# Altium PCB GT502W_BGS2.PcbDoc (part 1 of 2)
Units mil, origin at the board's own origin, x right, y up, seen from the top; angles counter-clockwise.
Board outline 2072.48 x 2691 mil, 2 copper layers (Top Layer, Bottom Layer), stack 10.556 mil thick; 126 components, 99 nets, 511 pads, 440 vias.
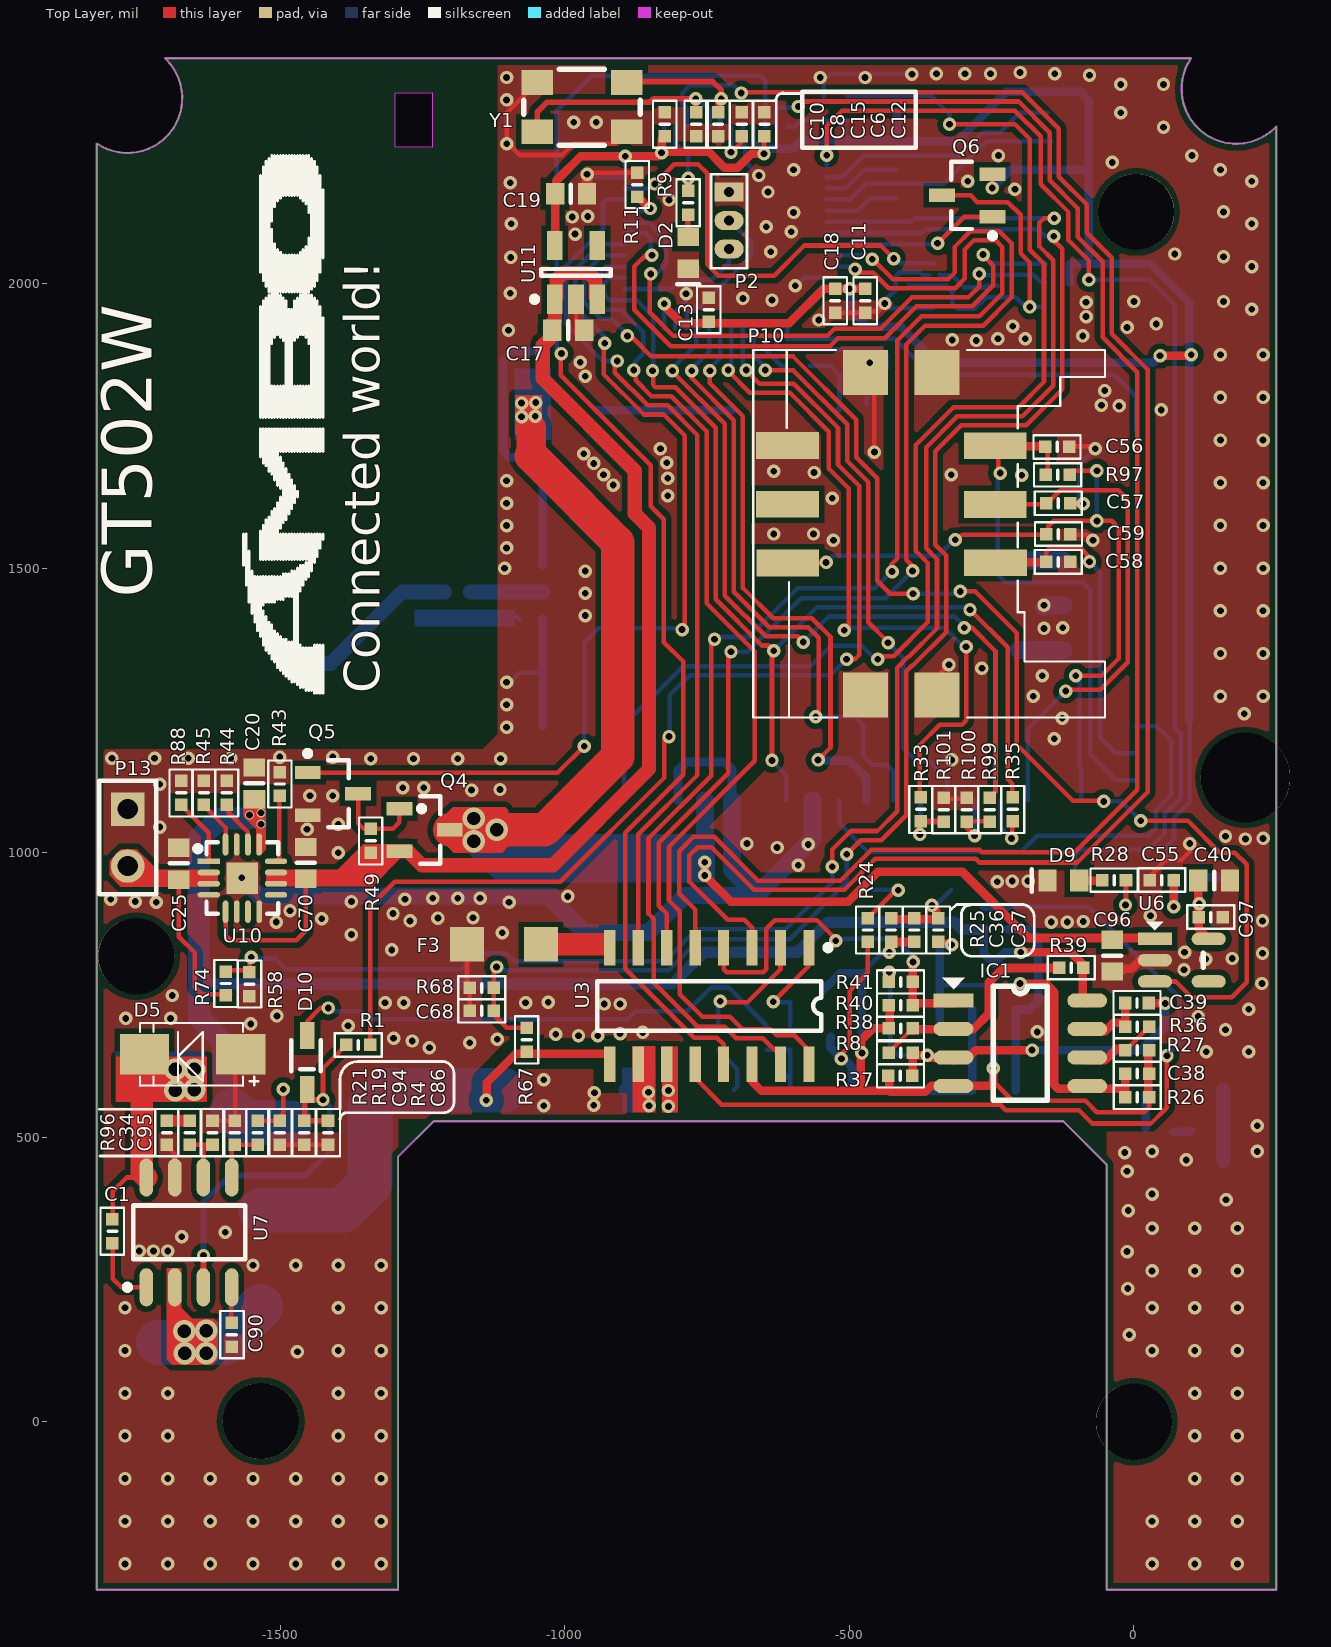
[diagram p0: Top Layer view]
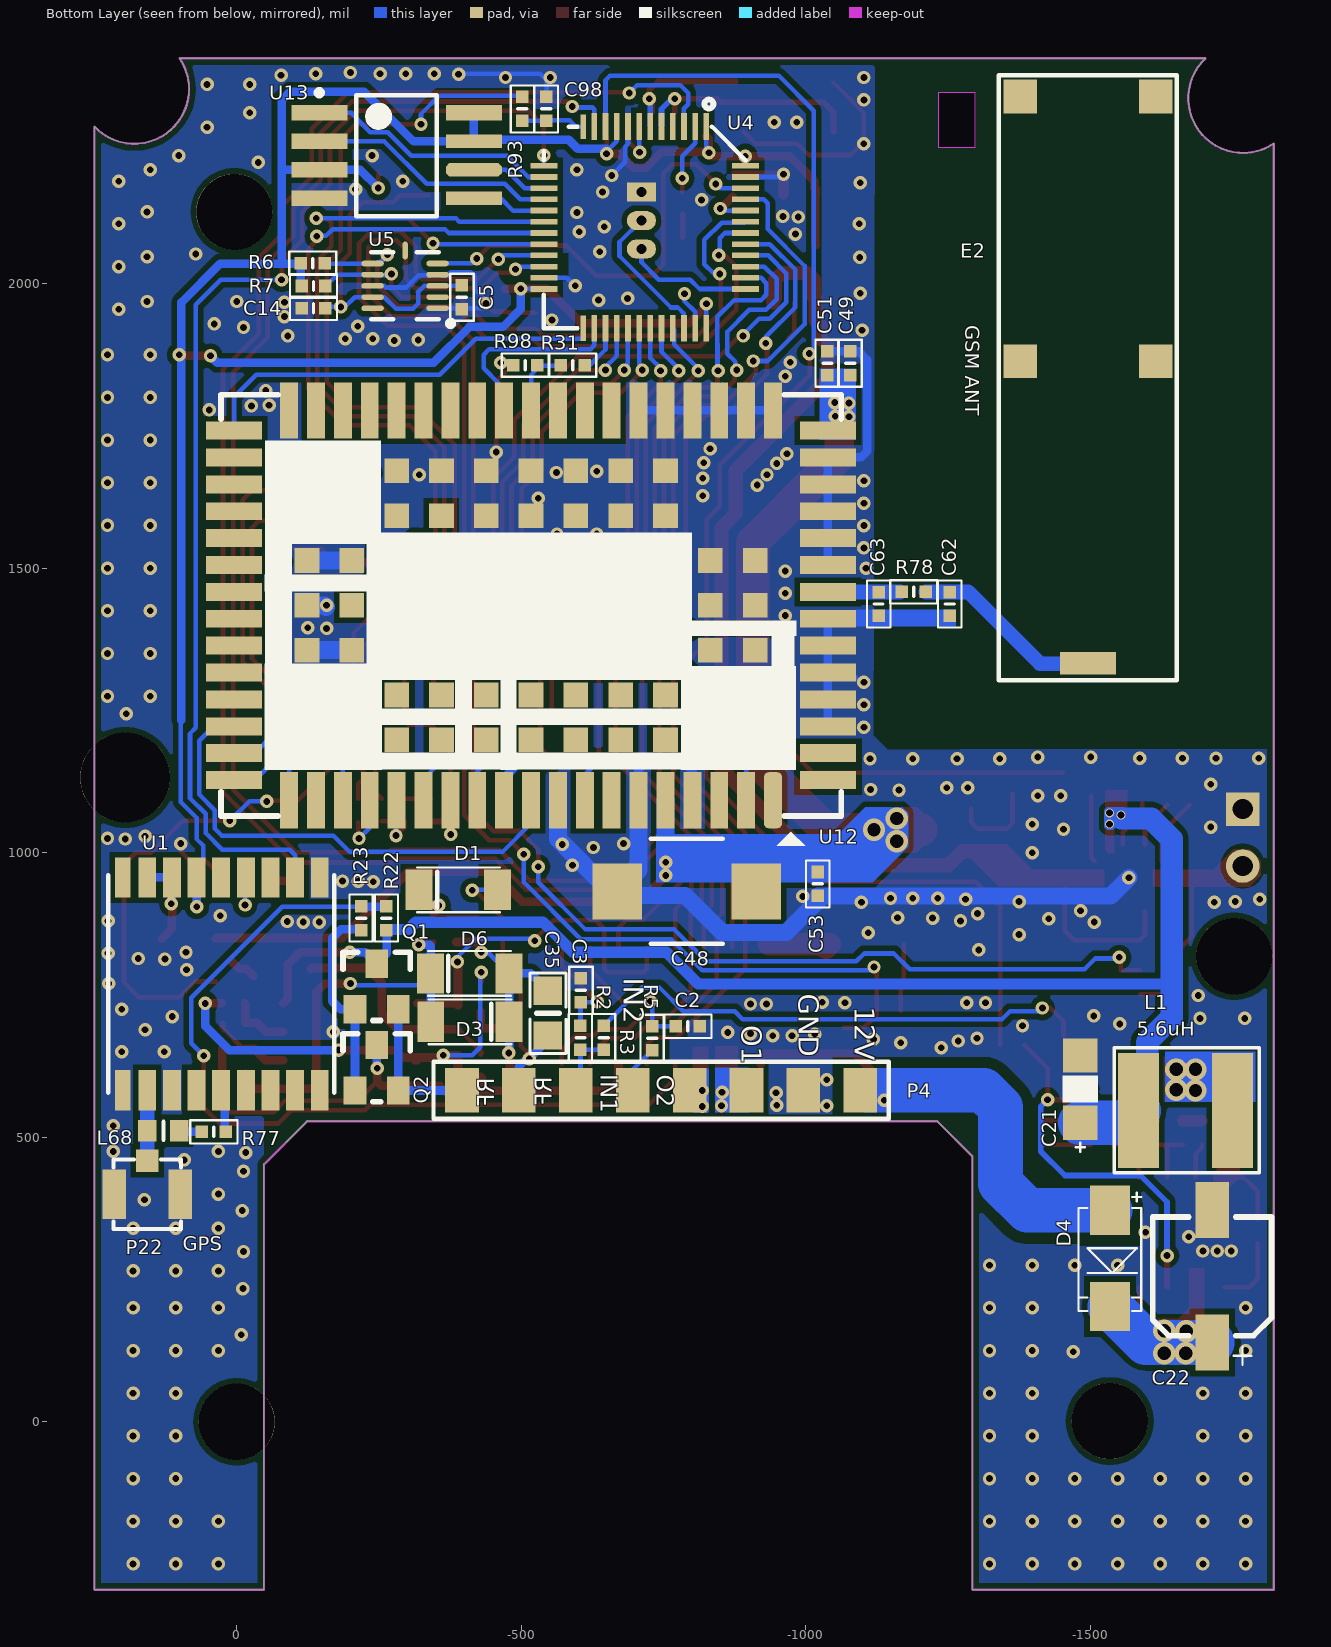
[diagram p1: Bottom Layer view, seen from below]
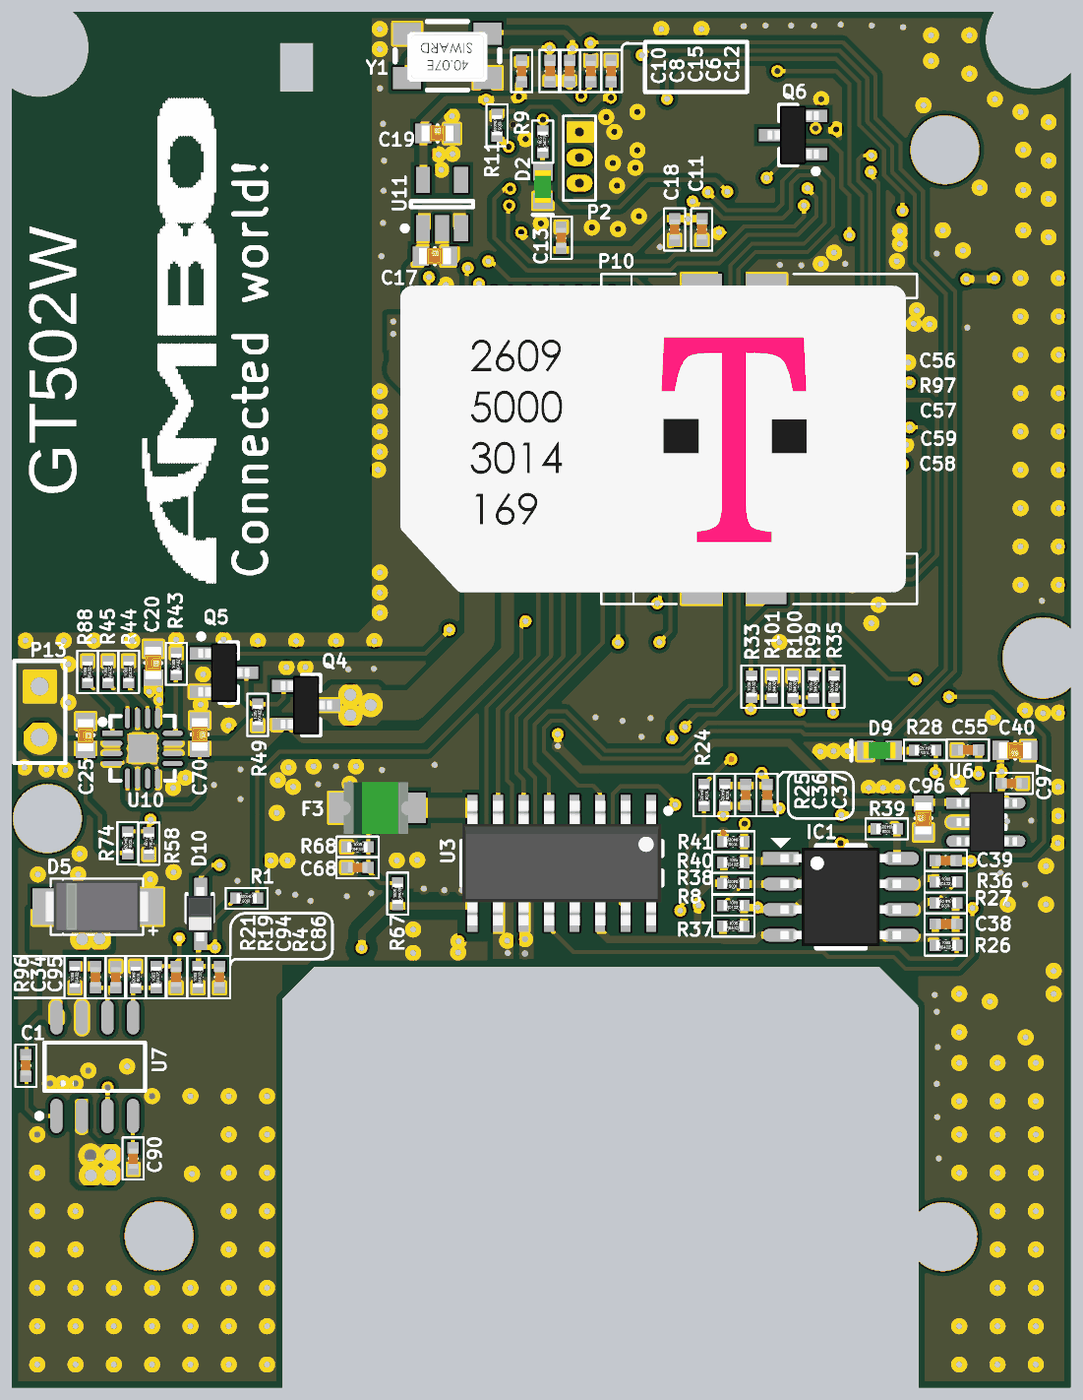
[diagram p3: 3D render of the assembled board from above, using the file's embedded part models]
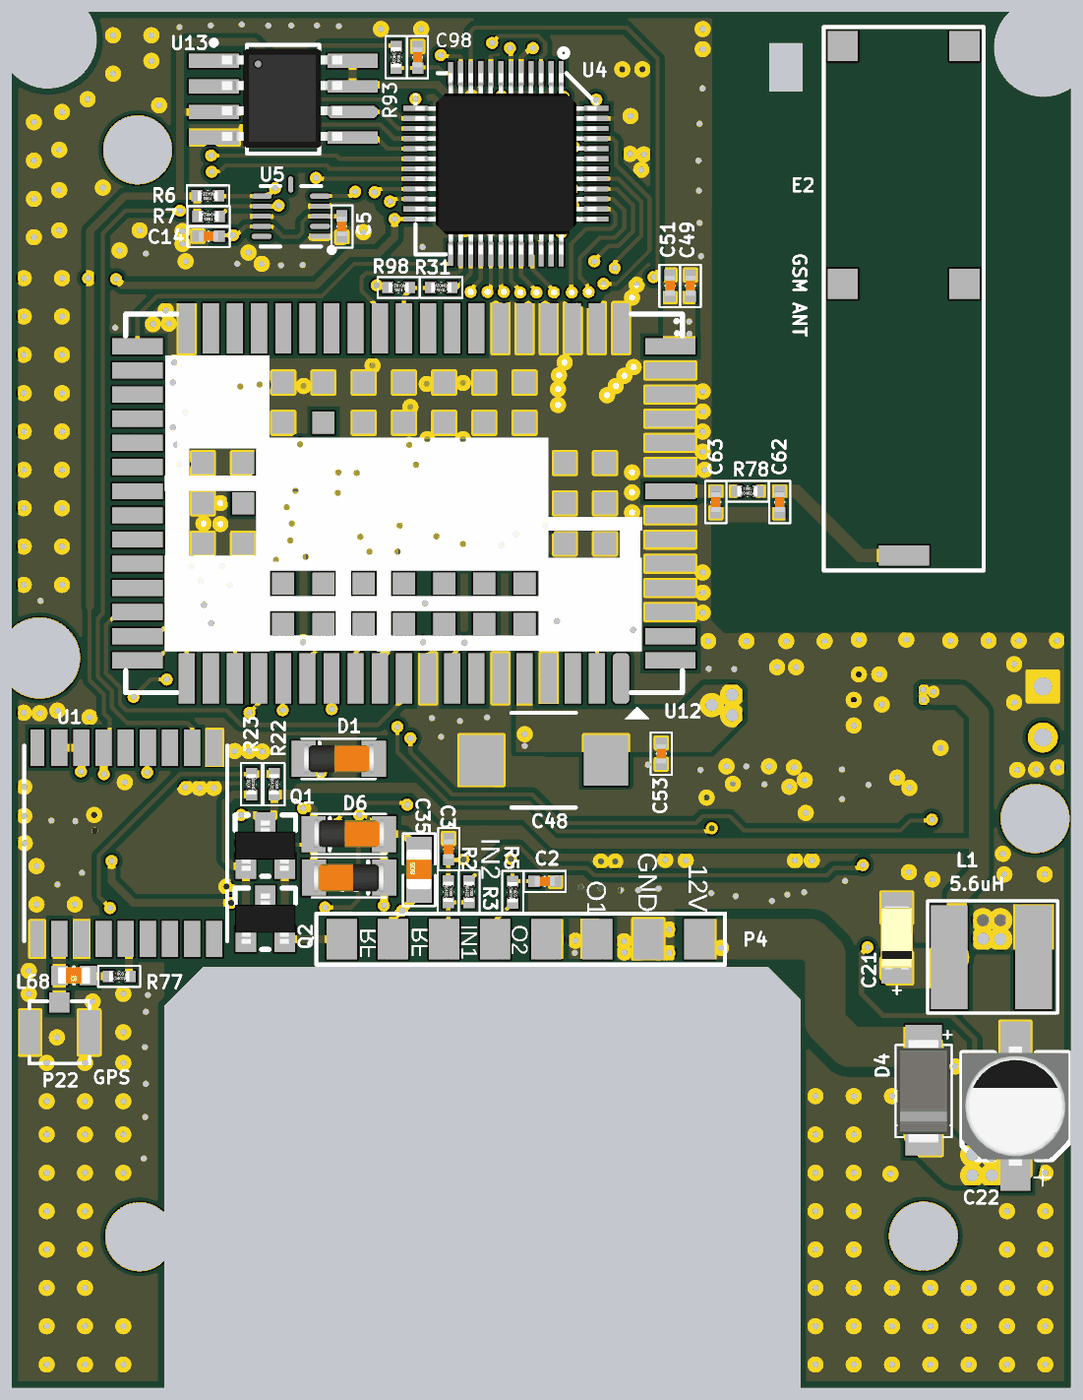
[diagram p4: 3D render of the assembled board from below, using the file's embedded part models]

## Layer stack, top to bottom
Top Layer: signal copper 1.378
Dielectric: core 7.8, FR-4, Dk 4.2
Bottom Layer: signal copper 1.378

## Board outline
-1822.48,-295.16 -1822.48,2246 -1822.4,2246 ccw(c-1768.63,2325.82) -1702.36,2395.62 -1702.36,2395.84 100.12,2395.84 100.12,2395.76 ccw(c179.94,2341.98) 249.74,2275.72 250,2275.48 250,-295.16 -48,-295.16 -48,452 -124,528 -1231,528 -1293,466 -1293,-295.16
cut-out: -1298,2335 -1233,2335 -1233,2240 -1298,2240

## Design rules (kind name [scope] priority, off if disabled: settings)
Clearance pol_some_net [InNamedPolygon('Top Layer-GND') Or  InNamedPolygon('Bottom Layer-GND') vs (InNet('*DIN1') OR InNet('*DIN2') OR InNet('RFID_ANT1') OR InNet('RFID_ANT2') OR InNet('VIN'))] p1: gap=19.68
Clearance pol_all [InNamedPolygon('Top Layer-GND') Or  InNamedPolygon('Bottom Layer-GND')] p2: gap=10
Clearance "Schematic Clearance Constraint" [InNet('NetL68_2')] p3: gap=10
Clearance [All] p4: gap=8
ComponentClearance [All] p1: gap=0 collisioncheckmode=3 verticalgap=0 showdistances=FALSE
HoleSize [All] p1: absolutevalues=TRUE maxlimit=500 minlimit=1 maxpercent=80.000 minpercent=20.000
HoleToHoleClearance [All] p1: gap=8 allowstackedmicrovias=TRUE
MinimumSolderMaskSliver [All] p1: minsoldermaskwidth=1
PolygonConnect pol_conn_style [All vs IsNamedPolygon('Bottom Layer-GND') Or  IsNamedPolygon('Top Layer-GND')] p1: connectstyle=Direct reliefconductorwidth=10 reliefentries=4 polygonreliefangle="90 Angle"
PolygonConnect Pol_Style [All vs IsNamedPolygon('L1_GND') Or  IsNamedPolygon('L3_GND') Or  IsNamedPolygon('L4_GND') Or  IsNamedPolygon('L2_GND')] p2: connectstyle=Direct reliefconductorwidth=10 reliefentries=4 polygonreliefangle="90 Angle" // V3
PolygonConnect L1-GND-GPS_1 [All vs IsNamedPolygon('L1-GND-GPS')] p3: connectstyle=Direct reliefconductorwidth=10 reliefentries=4 polygonreliefangle="90 Angle"
PolygonConnect L1-L4-GND-POLYGON-STYLE [All vs IsNamedPolygon('L2-GND-PCB') Or  IsNamedPolygon('L4-GND-PCB') Or  IsNamedPolygon('L1-GND-PCB') Or  IsNamedPolygon('L3-GND-PCB')] p4: connectstyle=Direct reliefconductorwidth=10 reliefentries=4 polygonreliefangle="90 Angle"
PolygonConnect GPS-PAD-L1 [All vs IsNamedPolygon('L1-GPS-PAD')] p5: connectstyle=Direct reliefconductorwidth=10 reliefentries=4 polygonreliefangle="90 Angle"
PolygonConnect "GPS PAD" [All vs IsNamedPolygon('L4-GPS-PAD')] p6: connectstyle=Direct reliefconductorwidth=10 reliefentries=4 polygonreliefangle="90 Angle"
PolygonConnect [All vs isvia] p7: connectstyle=Direct reliefconductorwidth=10 reliefentries=4 polygonreliefangle="90 Angle"
RoutingVias ThruVia [All] p1: holewidth=11.81 width=23.62 viastyle="Through Hole" minholewidth=11.81 minwidth=23.62 maxholewidth=39.37 maxwidth=78.74
SilkToSilkClearance [All] p1: silktosilkclearance=1
SilkscreenOverComponentPads [IsPad] p1: minsilkscreentomaskgap=0.1
SolderMaskExpansion SolderMaskExpansion_1 [IsVia] p1: expansion=-11.81
SolderMaskExpansion [All] p2: expansion=4
Width "Schematic Width Constraint" [InNet('NetL68_2')] p1: maxlimit=26 minlimit=26 preferedwidth=26
Width [All] p2: maxlimit=78.74 minlimit=8 preferedwidth=15
22 further rules are at their usual default settings.

## Classes and differential pairs
component class GSM/GPS: C40 C41 C48 C49 C51 C53 C55 C56 C57 C58 C59 C62 C63 C96 C97 D9 E2 L68 L69 P10 P22 R28 R31 R33 R35 R77 R78 R97 R98 R99 R100 R101 U1 U6 U12 U33
component class Main: Buzzer1 C2 C3 C5 C6 C8 C10 C11 C12 C13 C14 C15 C35 C36 C37 C38 C39 C68 C86 C98 D1 D2 D3 D6 D10 F3 IC1 P2 P4 Q1 Q2 Q6 R1 R2 R3 R4 R5 R6 R7 R8 R9 R11 R22 R23 R24 R25 R26 R27 R36 R37 R38 R39 R40 R41 R67 R68 R93 U3 U4 U5 U13 Y1
component class "Power Supply": C1 C17 C18 C19 C20 C21 C22 C25 C34 C70 C90 C94 C95 D4 D5 L1 P13 Q4 Q5 R19 R21 R43 R44 R45 R49 R58 R74 R88 R96 U7 U10 U11

## Components (designator, comment, footprint, x,y, rotation, side; value= is the part's Value field where it differs from the comment)
C1 "100nF" 0402_TYPE1 -1794.21,334.79 r270 top
C2 "100nF-16V-20%" 0402_TYPE1 -793,696 r180 bottom
C3 "100nF-16V-20%" 0402_TYPE1 -604,758 r90 bottom
C5 "100nF-16V-20%" 0402_TYPE1 -395,1976 r90 bottom
C6 "100nF-16V-20%" 0402_TYPE1 -690,2280 r90 top
C8 "15p-50V-5%" 0402_TYPE1 -770,2280 r90 top
C10 "100nF-16V-20%" 0402_TYPE1 -825.36,2280 r90 top
C11 "100nF-16V-20%" 0402_TYPE1 -471,1970 r270 top
C12 "100nF-16V-20%" 0402_TYPE1 -650,2280 r90 top
C13 "100nF-16V-20%" 0402_TYPE1 -748,1954 r90 top
C14 "100nF-16V-20%" 0402_TYPE1 -135,1957.79 r180 bottom
C15 "15p-50V-5%" 0402_TYPE1 -730,2280 r270 top
C17 "1uF-16V-20%" C0603 -1022,1918 r0 top
C18 "100nF-16V-20%" 0402_TYPE1 -526,1970 r90 top
C19 "1uF-16V-20%" C0603 -1017,2158 r0 top
C20 "1uF-16V-20%" C0603 -1545.76,1149.83 r270 top
C21 "4.7uF" C1206 -1482.4,529.39 r90 bottom
C22 "10uF, 35v" "CAPACITOR SIZE_C(D5.3)" -1714.31,139.37 r90 bottom
C25 "10uF-6V3-20%" C0603 -1678.24,1008.54 r270 top
C34 "1nF-5%" 0402_TYPE1 -1658.2,508 r270 top
C35 "0.1uF-50V" "C0805 - TYPE3" -547,718 r90 bottom
C36 "3.3nF-10%" 0402_TYPE1 -385,864 r270 top
C37 "10nF-10%" 0402_TYPE1 -343,864 r270 top
C38 "2.2nF-10%" 0402_TYPE1 6,611 r180 top
C39 "100nF-16V-20%" 0402_TYPE1 5.5,735 r180 top
C40 "10uF-6V3-20%" C0603 169,951 r180 top
C48 "470uF" C2917_smd -791,932 r0 bottom locked (schematic designator C1)
C49 "100n" 0402_TYPE1 -1079,1860 r270 bottom
C51 "10nF-10%" 0402_TYPE1 -1039,1860 r270 bottom
C53 "33pF-5%" 0402_TYPE1 -1022,945 r270 bottom
C55 "100nF-16V-20%" 0402_TYPE1 49,951 r180 top
C56 "100nF-16V-20%" 0402_TYPE1 -135,1714 r0 top
C57 "1n-50V-5%" 0402_TYPE1 -133,1613 r180 top
C58 "47p-50V-5%" 0402_TYPE1 -133,1510 r180 top
C59 "47p-50V-5%" 0402_TYPE1 -132.61,1559 r180 top
C62 "0.5pF" 0402_TYPE1 -1252.21,1437 r90 bottom
C63 "0.5pF" 0402_TYPE1 -1127.21,1437 r90 bottom
C68 "100nF-16V-20%" 0402_TYPE1 -1146,723 r0 top
C70 "10uF-6V3-20%" C0603 -1455,1010 r270 top
C86 "1uF-16V-20%" 0402_TYPE1 -1417,508 r90 top
C90 "10nF-10%" 0402_TYPE1 -1586,153 r90 top
C94 "100nF" 0402_TYPE1 -1502,508 r90 top
C95 "9pF" 0402_TYPE1 -1618.4,508 r270 top
C96 "1uF-16V-20%" C0603 -38,791 r90 top
C97 "100nF-16V-20%" 0402_TYPE1 135,886 r180 top
C98 "1nF-5%" 0402_TYPE1 -545,2307 r270 bottom
D1 "1N4148" DO-213AA -423,915 r0 bottom
D2 "LED GREEN" LED0603-G -783,2054 r270 top
D3 "1N4148" DO-213AA -376.4,722.37 r180 bottom
D4 "1N4007" "DO-214AC (SMA)" -1554.33,336.08 r270 bottom
D5 "B340A" "DO-214AC (SMA)" -1605,626 r180 top
D6 "1N4148" DO-213AA -443,768 r0 bottom
D9 "LED GREEN" LED0603-G -124,951 r180 top
D10 "1N4148" SOD323 -1453,678.49 r270 top
E2 "GSM Antena conecter" A10343-GSM850/900/1800/1900/WCDMA -1652.29,1863.89 r90 bottom
F3 "PTS120616V025" PTC1206 -1107,839 r180 top
IC1 "LM358" soic8 -317,740 r0 top
L1 "SD8350-5R6-R" SD8350-5R6-R -1667.46,546.85 r270 bottom
L68 "47nH" C0603 101,511 r0 bottom
P2 "Debug" HEADER_1.27mm_3PIN -711.42,2160.77 r270 top locked
P4 "Header 8" HDR1X8 -1095.92,582.28 r0 bottom locked
P10 "SIM CARD HOLDER" "SIM MF01-412-063X" -668.76,1560.43 r180 top locked
P13 "BAT" HDR1X2 -1768.09,1076.47 r270 top
P22 "IPEX" IPEX 157,429 r0 bottom
Q1 "J3Y" SOT23_123 -208,725 r180 bottom
Q2 "2TY" SOT23_123 -208,582 r180 bottom
Q4 "AO3401A" SOT23-3 -1246.46,1039.91 r0 top
Q5 "BSS138" SOT23-3 -1407.71,1103.4 r0 top
Q6 "BSS84" SOT23-3 -293,2155 r180 top
R1 "330R-5%" R0402_TYPE1 -1363,661.21 r180 top
R2 "10k-5%" R0402_TYPE1 -605,675 r270 bottom
R3 "15k-5%" R0402_TYPE1 -645.79,675 r270 bottom
R4 "3.3k-5%" R0402_TYPE1 -1459,508 r90 top
R5 "10k-5%" R0402_TYPE1 -731,674 r270 bottom
R6 "4k7-5%" R0402_TYPE1 -133.61,2035.27 r0 bottom
R7 "4k7-5%" R0402_TYPE1 -135,1995 r0 bottom
R8 "220k-5%" R0402_TYPE1 -410,649 r0 top
R9 "1k-5%" R0402_TYPE1 -784,2142 r90 top
R11 "10k-5%" R0402_TYPE1 -872,2174 r270 top
R19 "38.3k-1%" R0402_TYPE1 -1540.8,508 r90 top
R21 "10k-1%" R0402_TYPE1 -1579.6,508 r270 top
R22 "1k-5%" R0402_TYPE1 -264,885 r270 bottom
R23 "1k-5%" R0402_TYPE1 -218,885 r90 bottom
R24 "330R-5%" R0402_TYPE1 -467,864 r270 top
R25 "470k-1%" R0402_TYPE1 -426,864 r270 top
R26 "470k-5%" R0402_TYPE1 6,570.94 r0 top
R27 "330R-5%" R0402_TYPE1 6,652 r180 top
R28 "1k-5%" R0402_TYPE1 -34.88,950.82 r180 top
R31 "1k-5%" R0402_TYPE1 -590.5,1856 r0 bottom
R33 "1k-5%" R0402_TYPE1 -375,1076 r90 top
R35 "10k-5%" R0402_TYPE1 -212.21,1076 r270 top
R36 "220k-5%" R0402_TYPE1 6,695 r0 top
R37 "2.2M-5%" R0402_TYPE1 -410.28,608.51 r0 top
R38 "10k-5%" R0402_TYPE1 -410,690.21 r180 top
R39 "10k-5%" R0402_TYPE1 -110,797 r180 top
R40 "10k-5%" R0402_TYPE1 -410,732.79 r0 top
R41 "470k-5%" R0402_TYPE1 -410,772 r180 top
R43 "1k1-5%" R0402_TYPE1 -1501.58,1120.61 r90 top
R44 "47k-5%" R0402_TYPE1 -1595,1105 r90 top
R45 "3k-5%" R0402_TYPE1 -1635,1105 r90 top
R49 "10k-5%" R0402_TYPE1 -1342.13,1020.61 r90 top
R58 "2M-5%" R0402_TYPE1 -1555,769 r90 top
R67 "100k-5%" R0402_TYPE1 -1068,671 r90 top
R68 "10k-1%" R0402_TYPE1 -1146,763 r0 top
R74 "2M-5%" R0402_TYPE1 -1595,770 r270 top
R77 "10R-5%" R0402_TYPE1 40,510 r180 bottom
R78 "0R" R0402_TYPE1 -1190,1459 r180 bottom
R88 "10k-5%" R0402_TYPE1 -1675,1105 r90 top
R93 "100k-5%" R0402_TYPE1 -503,2307 r270 bottom
R96 "64.9k-1%" R0402_TYPE1 -1700,508 r90 top
R97 "4k7-5%" R0402_TYPE1 -134,1663 r180 top
R98 "5k6-5%" R0402_TYPE1 -507,1856 r0 bottom
R99 "1k-5%" R0402_TYPE1 -254,1075.6 r90 top
R100 "5k6-5%" R0402_TYPE1 -294.33,1075.6 r90 top
R101 "5k6-5%" R0402_TYPE1 -334.67,1075.6 r90 top
U1 "L70R" MAX7 27.17,769.43 r180 bottom locked
U3 "ULN2003A/SO" SO16-150mil -746,730.64 r180 top locked
U4 "STM32F103CBT6TR" TQFP-48-P0.5 -717.1,2098.78 r270 bottom locked
U5 "MMA7660FC" MMA7660FC -296,1996 r0 bottom locked
U6 "XC6209B332MRN_SOT-25" SOT23-5#1 37,848.4 r0 top
U7 "TPS54232" SOIC127P600-8AL -1660.38,332.68 r90 top
U10 "bq24073" pq24073 -1566.75,955.3 r0 top locked
U11 "XC6209B332MRN_SOT-25" SOT23-5#2 -980.4,2019.76 r90 top
U12 "CINTERION BGS2" "CINTERION BGS2" -517.35,1434.6 r0 bottom locked (schematic designator U1)
U13 "MX25L8005MC-15G_SOP-8L" SO8-200mil -281,2225 r180 bottom
Y1 "8.000 MHZ" "SMD CRYSTAL 4 X 2.5" -970,2310 r180 top

## Footprints (in the part's own frame and the unit in brackets; to place one, negate y for a bottom-side part, rotate by r counter-clockwise, add the part's x,y. Pads: shape width x height; smd on the part's side, far side on the other; paste and mask are expansions set on the pad)
0402_TYPE1 [mil]
  rect 22x22 smd: 1(-21,-0.79) 2(21,-0.79)
  silkscreen extent -41,-22 41,20, body extent -20,-11 20,9, height 20
A10343-GSM850/900/1800/1900/WCDMA [mm] "http://www.antenova-m2m.com/products/giganova-standard-antennas"
  rect 1x2.5 smd: 1(-13.49,3.96)
  rect 1.5x1.5 smd: 2(11.81,0.95) 3(11.81,7) 4(0,7) 5(0,0.95)
  silkscreen extent -14.24,0 12.76,7.95, body extent -14.25,0 12.76,7.95, height 3.3
C0603 [mil]
  rect 32x38 smd: 1(0,0) 2(56,0)
  silkscreen extent 28,-16 28,16, body extent -4,-16 59,16, height 12
"C0805 - TYPE3" [mm] "Chip Capacitor; Body 2.0 x 1.2 mm (LxW typ)"
  rect 1.27x1.27 smd: 1(1,0) 2(-1,0)
  silkscreen extent -1.8,-0.81 1.8,0.8, body extent -0.99,-0.62 1.01,0.63, height 0.78
C1206 [mil]
  rect 60x60 smd: 1(-3.93,0) 2(114.18,0)
  silkscreen extent -55,-31 79,32, body extent -8,-31 118,31, height 63
C2917_smd [mm] "Chip Capacitor, 2-Leads, Body 7.30x4.30mm, IPC Medium Density"
  rect 2.2x2.5 smd: 1(-3.1,0) 2(3.1,0)
  silkscreen extent -1.6,-2.35 1.6,2.35, body extent -3.75,-2.05 3.75,2.05, height 3.1
"CAPACITOR SIZE_C(D5.3)" [mm]
  rect 2.5x1.5 smd: 1(0,0) 2(5.9,0)
  silkscreen extent -1,-2.65 5.6,2.65, body extent 0,-2.65 5.9,2.65, height 5.4
"CINTERION BGS2" [mm]
  rrect50% 0.8x2.5 smd: 1(-10.8,8.7)
  rect 0.8x2.5 smd: 2(-9.6,8.7) 3(-8.4,8.7) 4(-7.2,8.7) 5(-6,8.7) 6(-4.8,8.7) 7(-3.6,8.7) 8(-2.4,8.7) 9(-1.2,8.7) 10(0,8.7) 11(1.2,8.7) 12(2.4,8.7) 13(3.6,8.7) 14(4.8,8.7) 15(6,8.7) 16(7.2,8.7) 17(8.4,8.7) 18(9.6,8.7) 19(10.8,8.7) 34(10.8,-8.7) 35(9.6,-8.7) 36(8.4,-8.7) 37(7.2,-8.7) 38(6,-8.7) 39(4.8,-8.7) 40(3.6,-8.7) 41(2.4,-8.7) 42(1.2,-8.7) 43(0,-8.7) 44(-1.2,-8.7) 45(-2.4,-8.7) 46(-3.6,-8.7) 47(-4.8,-8.7) 48(-6,-8.7) 49(-7.2,-8.7) 50(-8.4,-8.7) 51(-9.6,-8.7) 52(-10.8,-8.7)
  rect 2.5x0.8 smd: 20(13.25,7.8) 21(13.25,6.6) 22(13.25,5.4) 23(13.25,4.2) 24(13.25,3) 25(13.25,1.8) 26(13.25,0.6) 27(13.25,-0.6) 28(13.25,-1.8) 29(13.25,-3) 30(13.25,-4.2) 31(13.25,-5.4) 32(13.25,-6.6) 33(13.25,-7.8) 53(-13.25,-7.8) 54(-13.25,-6.6) 55(-13.25,-5.4) 56(-13.25,-4.2) 57(-13.25,-3) 58(-13.25,-1.8) 59(-13.25,-0.6) 60(-13.25,0.6) 61(-13.25,1.8) 62(-13.25,3) 63(-13.25,4.2) 64(-13.25,5.4) 65(-13.25,6.6) 66(-13.25,7.8)
  rect 1.1x1.1 smd: 67(-6,6) 68(-4,6) 69(-2,6) 70(0,6) 71(2,6) 72(4,6) 73(6,6) 74(-6,4) 75(-4,4) 76(-2,4) 77(0,4) 78(2,4) 79(4,4) 80(6,4) 81(-10,2) 82(-8,2) 83(8,2) 84(10,2) 85(-10,0) 86(-8,0) 87(8,0) 88(10,0) 89(-10,-2) 90(-8,-2) 91(8,-2) 92(10,-2) 93(-6,-4) 94(-4,-4) 95(-2,-4) 96(0,-4) 97(2,-4) 98(4,-4) 99(6,-4) 100(-6,-6) 101(-4,-6) 102(-2,-6) 103(0,-6) 104(2,-6) 105(4,-6) 106(6,-6)
  silkscreen extent -13.85,-9.4 13.84,10.73
DO-213AA [mm]
  rect 1.2x1.8 smd: 1(-0.899,-0.5) 2(2.597,-0.5)
  silkscreen extent -1,-1.5 2.7,0.5, body extent -0.92,-1.24 2.58,0.21, height 1.43
"DO-214AC (SMA)" [mm]
  rect 2.2x1.8 smd: 1(-0.899,-0.5) 2(3.397,-0.5)
  silkscreen extent -1.7,-1.9 3.6,0.9, body extent -1.3,-1.8 3.9,0.8, height 2.3
HDR1X2 [mm] "Connector; Header; 2 Position"
  rect 1.5x1.5 hole 0.9: 1(0,0)
  round 1.5 hole 0.9: 2(2.54,0)
  silkscreen extent -1.27,-1.27 3.81,1.27
HDR1X8 [mm] "Connector; Header; 8 Position"
  rect 1.5x2 smd: 1(0,0) 2(2.54,0) 3(5.08,0) 4(7.62,0) 5(10.16,0) 6(12.7,0) 7(15.24,0) 8(17.78,0)
  silkscreen extent -1.27,-1.27 19.05,1.27
HEADER_1.27mm_3PIN [mm]
  rect 0.85x1.3 hole 0.45: 1(0,0)
  oval 0.85x1.3 hole 0.45: 2(1.27,0) 3(2.54,0)
  silkscreen extent -0.8,-0.8 3.4,0.8
IPEX [mm]
  rect 1x1 smd: 1(0,-0.75)
  rect 1.05x2.2 smd: 2(-1.475,0.75) 3(1.475,0.75)
  silkscreen extent -1.5,-0.8 1.5,2.3
LED0603-G [mil]
  rect 32x38 smd: 1(-28,0) 2(28,0)
  silkscreen extent 55,-20 55,19, body extent -32,-16 32,16, height 43
MAX7 [mm]
  rect 0.8x1.8 smd: 1(4.4,4.75) 2(3.3,4.75) 3(2.2,4.75) 4(1.1,4.75) 5(0,4.75) 6(-1.1,4.75) 7(-2.2,4.75) 8(-3.3,4.75) 11(-3.3,-4.75) 12(-2.2,-4.75) 13(-1.1,-4.75) 14(0,-4.75) 15(1.1,-4.75) 16(2.2,-4.75) 17(3.3,-4.75) 18(4.4,-4.75)
  rect 0.7x1.8 smd: 9(-4.4,4.75) 10(-4.4,-4.75)
  silkscreen extent -5.05,-4.85 5.05,4.85, body extent -5.05,-4.87 5.07,4.84, height 0.56
MMA7660FC [mm] "QFN, 12-Leads, Body 3,0x3,0mm (max), Pitch 0,50mm, IPC Medium Density"
  oval 1x0.25 smd: 1(-1.45,1) 2(-1.45,0.5) 3(-1.45,0) 4(-1.45,-0.5) 5(-1.45,-1) 6(1.45,-1) 7(1.45,-0.5) 8(1.45,0) 9(1.45,0.5) 10(1.45,1)
  oval 0.25x0.8 smd: 11(0,-1.58)
  silkscreen extent -2.16,-1.5 1.5,1.8, body extent -1.5,-1.5 1.5,1.5, height 0.9
pq24073 [mm]
  rect 1x0.25 smd: 1(-1.5,0.75)
  oval 1x0.25 smd: 2(-1.5,0.25) 3(-1.5,-0.25) 4(-1.5,-0.75) 9(1.5,-0.75) 10(1.5,-0.25) 11(1.5,0.25) 12(1.5,0.75)
  oval 0.25x1 smd: 5(-0.75,-1.5) 6(-0.25,-1.5) 7(0.25,-1.5) 8(0.75,-1.5) 13(0.75,1.5) 14(0.25,1.5) 15(-0.25,1.5) 16(-0.75,1.5)
  rect 1.4x1.4 smd: 17(0,0)
  silkscreen extent -2.11,-1.6 1.6,1.61, body extent -1.58,-1.57 1.58,1.58, height 1
PTC1206 [mil]
  rect 60x60 smd: 1(-65,0) 2(65,0)
  body extent -60,-50 66,51, height 27
R0402_TYPE1 [mil]
  rect 22x22 smd: 1(-21,-0.79) 2(21,-0.79)
  silkscreen extent -41,-21 41,20, body extent -20,-11 20,9, height 14
SD8350-5R6-R [mil] "Using in PJ2000V1"
  rect 202.73x72 smd: 1(0,82.6) 2(0,-82.6)
  silkscreen extent -110,-125 109,130
"SIM MF01-412-063X" [mm] "http://www.fcn.com.tw/zh/product/ProductList.aspx?Type=13"
  rect 2.8x1.2 smd: 1(-10.8,-3.93) 2(-10.8,-1.31) 3(-10.806,1.295) 5(-1.52,-3.94) 6(-1.526,-1.315) 7(-1.54,1.31)
  rect 2x2 smd: 8(-8.2,7.2) 9(-5,-7.2) 10(-8.2,-7.2) 11(-5,7.2)
  silkscreen extent -15.7,-8.2 0,8.2, body extent -15.7,-8.2 10,8.2, height 2.9
"SMD CRYSTAL 4 X 2.5" [mm]
  rect 1.4x1.1 smd: 1(-2,-1.1) 2(2,-1.1) 3(2,1.1) 4(-2,1.1)
  silkscreen extent -2.6,-1.7 2.6,1.7, body extent -2,-1.2 2,1.3, height 0.63
SO8-200mil [mm] "8-Pin Plastic Medium Body Small Outline Package 1.27 mm Pitch, IPC Low Density"
  rect 2.5x0.7 smd: 1(-3.45,1.905) 2(-3.45,0.635) 3(-3.45,-0.635) 4(-3.45,-1.905) 8(3.45,1.905)
  rect 2.5x0.6 smd: 5(3.45,-1.905) 7(3.45,0.635)
  oct 2.5x0.6 smd: 6(3.45,-0.635)
  silkscreen extent -3.57,-2.7 1.8,2.93, body extent -3.05,-2.4 2.95,2.5, height 1.7
SO16-150mil [mm] "Small Outline; 16 Leads; Body Width 3.9 mm; Pitch 1.27 mm"
  rect 0.5x1.6 smd: 1(-4.445,-2.6) 2(-3.175,-2.6) 3(-1.905,-2.6) 4(-0.635,-2.6) 5(0.635,-2.6) 6(1.905,-2.6) 7(3.175,-2.6) 8(4.445,-2.6) 9(4.445,2.6) 10(3.175,2.6) 11(1.905,2.6) 12(0.635,2.6) 13(-0.635,2.6) 14(-1.905,2.6) 15(-3.175,2.6) 16(-4.445,2.6)
  silkscreen extent -5.42,-2.72 5,1.1, body extent -4.95,-3.1 4.95,3.1, height 1.7
SOD323 [mm]
  rect 1.2x0.65 smd: 1(0,0) 2(2.4,0)
  silkscreen extent 0.2,-0.7 1.6,0.6, body extent -0.15,-0.7 2.55,0.65, height 0.79
soic8 [mil]
  rect 70x25 smd: 1(0,0)
  oval 70x25 smd: 2(0,-50) 3(0,-100) 4(0,-150) 5(235,-150) 6(235,-100) 7(235,-50) 8(235,0)
  silkscreen extent -20,-175 165,40, body extent -1,-171 235,21, height 69
SOIC127P600-8AL [mm] "SOIC, 8-Leads, Body 4.9x3.9mm, Pitch 1.27mm, IPC High Density"
  oval 1.7x0.6 smd: 1(-2.45,1.905) 2(-2.45,0.635) 3(-2.45,-0.635) 4(-2.45,-1.905) 5(2.45,-1.905) 6(2.45,-0.635) 7(2.45,0.635) 8(2.45,1.905)
  silkscreen extent -2.57,-2.5 1.2,2.88, body extent -2,-2.5 2,2.5, height 2.72
SOT23-3 [mm] "SOT23, 3-Leads, Body 2.9x1.3mm, Pitch 0.95mm, Lead Span 2.4mm, IPC Medium Density"
  rect 1.15x0.6 smd: 1(-1.125,0.95) 2(-1.125,-0.95) 3(1.125,0)
  silkscreen extent -0.26,-1.5 0.7,1.5, body extent -1.27,-1.46 1.28,1.46, height 0.99
SOT23-5#1 [mil]
  rect 60x22 smd: 1(0,0)
  oval 60x22 smd: 2(0,-37.4) 3(0,-74.8) 4(94.49,-74.8) 5(94.49,0)
  silkscreen extent -15,-50 85,30, body extent -10,-96 108,22, height 58
SOT23-5#2 [mil] "SOT23, 5-Leads, Body 2.9x1.6mm, Pitch 0.95mm, Lead Span 2.8mm, IPC Low Density"
  rect 51.18x27.56 smd: 1(-47.24,37.4) 2(-47.24,0) 3(-47.24,-37.4) 4(47.24,-37.4) 5(47.24,37.4)
  silkscreen extent -52,-61 6,78, body extent -35,-61 35,61, height 57
SOT23_123 [mil]
  rect 40x50 smd: 1(0,0) 2(76,0) 3(38,80)
  silkscreen extent -21,-20 97,100, body extent -21,-9 97,89, height 44
TQFP-48-P0.5 [mm] "Thin QFP, 48-Leads, Body 7x7mm, Pitch 0.5mm, IPC Medium Density"
  rect 1.2x0.254 smd: 1(-4.5,2.75) 2(-4.5,2.25) 3(-4.5,1.75) 4(-4.5,1.25) 5(-4.5,0.75) 6(-4.5,0.25) 7(-4.5,-0.25) 8(-4.5,-0.75) 9(-4.5,-1.25) 10(-4.5,-1.75) 11(-4.5,-2.25) 26(4.5,-2.25) 27(4.5,-1.75) 28(4.5,-1.25) 29(4.5,-0.75) 30(4.5,-0.25) 31(4.5,0.25) 32(4.5,0.75) 33(4.5,1.25) 34(4.5,1.75) 35(4.5,2.25) 36(4.5,2.75)
  rect 1.092x0.254 smd: 12(-4.5,-2.75)
  rect 0.254x1.2 smd: 13(-2.75,-4.5) 14(-2.25,-4.5) 15(-1.75,-4.5) 16(-1.25,-4.5) 17(-0.75,-4.5) 18(-0.25,-4.5) 19(0.25,-4.5) 20(0.75,-4.5) 21(1.25,-4.5) 22(1.75,-4.5) 23(2.25,-4.5) 24(2.75,-4.5) 37(2.75,4.5) 38(2.25,4.5) 39(1.75,4.5) 40(1.25,4.5) 41(0.75,4.5) 42(0.25,4.5) 43(-0.25,4.5) 44(-0.75,4.5) 45(-1.25,4.5) 46(-1.75,4.5) 47(-2.25,4.5) 48(-2.75,4.5)
  rect 1.143x0.254 smd: 25(4.5,-2.75)
  silkscreen extent -5.71,-4.5 4.5,4.5, body extent -4.5,-4.5 4.5,4.5, height 1.5

## Part data
C1 C94: library part Cap, "Capacitor"
C2 C3 C5 C6 C10 C11 C12 C13 C14 C18 C39 C55 C56 C68 C97: library part Cap, "CAP CER 0.1UF 16V Y5V 0402"
C8 C15: library part Cap, "CAP CER 15PF 50V 5% NPO 0402"
C17 C19 C20 C86 C96: library part Cap, "CAP CER 1UF 16V Y5V 0603"
C21: library part Cap2, "Capacitor"
C22: library part "Cap Pol3", "CAP ALUM 10UF 35V 20% SMD"
C25 C40 C70: library part Cap, "CAP CER 10UF 6.3V 20% X5R 0603"
C34 C98: library part 1nF-50V-C0805, "Non-Polarized Capacitor"
C35: library part CN2, "CAP CER 0.1UF 50V Y5V 0603"
C36: library part 1nF-50V-C0805, "CAP CER 3300PF 50V 10% X7R 0402"
C37 C51 C90: library part 10nF-50V-C0805, "Non-Polarized Capacitor"
C38: library part 2.2nF-50V-C0805, "CAP CER 2200PF 50V 10% X7R 0402"
C48: library part Cap2, "CAP TANT 470UF 6.3V 10% 2917"
C49: library part "CAP NP", "CAP CER 0.1UF 16V 10% X7R 0805"
C53: library part 33pF-50V-C0805, "Non-Polarized Capacitor"
C57 C58 C59: library part Cap, "CAP CER 47PF 50V 5% NPO 0402"
C62 C63: library part 0.5pF-50V-C0805, "Non-Polarized Capacitor"
C95: library part 9pF-50V-C0805, "Non-Polarized Capacitor"
D1 D3 D6: "DIODE SMALL SIG 100V 0.2A ALF2"
D2 D9: library part LED2, "LED GREEN CLEAR THIN 0603 SMD"
D4: library part Diode, "DIODE GEN PURPOSE 1000V 1A SMA"
D5: library part "D Schottky", "DIODE SCHOTTKY 40V 3A SMA"
D10: library part Diode, "DIODE SWITCH 75V 200MW SOD323"
E2: library part "Header 5", "Header, 5-Pin"
F3: library part "Fuse 2", "PTC RESETTABLE SMD 1206 16V .25A"
IC1: "Low-Power Dual Operational Amplifier"
L1: library part Inductor, "Digikey part SD8350-4R7-R"
L68: library part Inductor, "Inductor"
P2: library part "Header 3", "NA"
P4: "Header, 8-Pin"
P10: library part "SIM CARD", "SIM _CONNECTOR_410108105011-2LF"
P13: library part "Header 2", "Header, 2-Pin"
Q1: library part NPN_123, "NPN Bipolar Transistor"
Q2: library part PNP_123, "PNP Bipolar Transistor"
Q4: library part MOSFET-P, "MOSFET P-CH -30V -4.3A SOT23"
Q5: library part MOSFET-P, "MOSFET N-CH 50V 200MA SOT23-3"
Q6: library part MOSFET-P, "MOSFET P-CH 50V 130MA SOT23-3"
R1 R27: library part 330R-5%-R0805, "RES 330 OHM 1/8W 5% 0805 SMD"
R2 R5 R38 R39 R40: library part 10k-5%-R0805, "RES 10k OHM 1/8W 5% 0805 SMD"
R3: library part 105k-1%-R0805, "RES 105k OHM 1/4W 1% 0805 SMD"
R4: library part 26.1k-1%-R0805, "RES 26.1k OHM 1/4W 1% 0805 SMD"
R6 R7 R97 R98 R100 R101: library part Res1, "RES 4.7K OHM 1/16W 5% 0402 SMD"
R8 R36: library part 220k-5%-R0805, "RES 220k OHM 1/8W 5% 0805 SMD"
R9 R28 R31 R33 R99: library part Res1, "RES 1.0K OHM 1/16W 5% 0402 SMD"
R11 R35 R49 R88: library part Res1, "RES 10K OHM 1/16W 5% 0402 SMD"
R19: library part 38.3k-1%-R0805, "RES 38.3k OHM 1/4W 1% 0805 SMD"
R21: library part 10k-1%-R0805, "RES 10k OHM 1/4W 1% 0805 SMD"
R22 R23: library part 1k-5%-R0805, "RES 1k OHM 1/8W 5% 0805 SMD"
R24: library part 330k-5%-R0805, "RES 330 OHM 1/8W 5% 0805 SMD"
R25: library part 470k-1%-R0805, "RES 470k OHM 1/4W 1% 0805 SMD"
R26 R41: library part 470k-5%-R0805, "RES 470k OHM 1/8W 5% 0805 SMD"
R37: library part 2.2M-5%-R0805, "RES 2.2M OHM 1/8W 5% 0805 SMD"
R43: library part Res1, "RES 1.1K OHM 1/16W 5% 0402 SMD"
R44: library part Res1, "RES 47K OHM 1/16W 5% 0402 SMD"
R45: library part Res1, "RES 1.5K OHM 1/16W 5% 0402 SMD"
R58 R67 R93: library part Res1, "RES 100K OHM 1/16W 5% 0402 SMD"
R68: library part Res1, "RES 10.0K OHM 1/16W 1% 0402 SMD"
R74: library part Res1, "RES 2M OHM 1/16W 1% 0402"
R77: library part 10R-5%-R0402, "RES 10 OHM 1/16W 5% 0402 SMD"
R78: library part 0R-0805
R96: library part 64.9k-1%-R0805, "RES 64.9k OHM 1/4W 1% 0805 SMD"
U1: library part MAX-7
U3: library part ULN2003A/SO_0, "IC DARL TRANS ARRAY 16-SOIC"
U4: library part ATmega128_4, "MCU ARM 128K FLASH/TIMER"
U5: "ACCELEROMETER 3X3 DGTL 10-DFN"
U7: library part Component_1
U10: library part BATTERY_CHARGER, "IC LI-ION CHARGE/PWR MGMT 16-QFN"
U12: library part "CINTERION EHS5", "CINTERION EHS5"
U13: library part FlashIC
Y1: library part CRYSTAL-SMT, "CRYSTAL 8.000 MHZ 18PF SMD"

## Free pads (board coordinates)
  round 133.86 hole 133.86: 0(3.94,2125.98) 1(0,0) 2(-1753,818) 2(-1534.39,1.18)
  round 157.48 hole 157.48: 0(195.94,1131.98)

## Via types
v1: diameter 23.62, hole 11.81, Top Layer to Bottom Layer, 426 vias
v2: diameter 39.37, hole 23.62, Top Layer to Bottom Layer, 11 vias
v3: diameter 16, hole 11.81, Top Layer to Bottom Layer, 3 vias

## Nets (pads, with @x,y where several pads share a name; then routed paths per layer and width w, separated by ;. In a path a pad name is that pad's centre, name@x,y a point inside that pad or via, vN(x,y) a via of type N, cw(c..) or ccw(c..) an arc to the next point about the centre after c; other vN are vias at no path point)
3V3: C10.1 C11.1 C12.1 C13.1 C18.2 C19.1 C55.1 Q6.2 R6.2 R7.2 U1.6 U4.1 U4.9 U4.24 U4.36 U4.48 U11.5 U13.3 U13.7 U13.8 | length 4403.6
  Top Layer w8: v1(-650,2228) C12.1@-650,2259 ; v1(-249,2168) -248.71,2168.29 Q6.2@-248.71,2192.4
  Top Layer w15: U11.5@-1017.8,2067 -1017,2067.8 C19.1@-1017,2158 ; C19.1@-1017.4,2158 -1017.4,2165.6 -1015,2168 -1015,2180.62 -971.62,2224 v1(-894,2224) -836,2224 v1(-830,2230) ; C10.1@-825.36,2259 -830,2254.36 v1(-830,2230) ; v1@-825,1964.5 -825,1960 -795.5,1930.5 -605.5,1930.5 -545,1991 C18.2@-525.21,1991 C11.1@-471.79,1991 C11.1@-471,1991 ; v1(-650,2228) -672.38,2228 -696.69,2203.69 -719.31,2203.69 -747.62,2232 -824,2232 -828,2228 v1(-830,2230) ; v1(46,1873) 99,1873 v1(101,1875) ; v1(70,905) C55.1@70,951
  Bottom Layer w8: U4.48@-894.26,2207.05 -894.26,2223.74 v1(-894,2224) ; v1(-830,2230) -825.36,2234.64 U4.1@-825.36,2275.95 ; v1(-825.5,1964.5) -825.36,1964.36 U4.36@-825.36,1921.62 ; U4.9@-667.88,2275.95 -667.88,2249.88 -650,2232 v1(-650,2228) ; U4.24@-539.93,1990.52 -539.61,1990.83 v1(-499.17,1990.83) ; U1.6@59,985 59,1012.53 70.47,1024 70.47,1061.47 98,1089 98,1231 95,1234
  Bottom Layer w15: v1@-650,2236.83 -599.53,2236.83 -583.48,2252.88 -419.71,2252.88 U13.7@-416.83,2250 ; v1(-499.17,1990.83) -499.17,1955.17 -468,1924 -409,1924 -346,1861 34,1861 v1(46,1873) ; U13.8@-416.83,2300 U13.7@-416.83,2250 ; v1(-249,2168) -217,2200 U13.3@-145.17,2200 -81,2200 -79,2198 ; R7.2@-112.61,2001.13 -112.61,2035.27 -79,2035.27 ; v1(70,905) 70.47,905.47 U1.6@70.47,956.44 ; 97,1233 97,1967 28.73,2035.27 -79,2035.27 ; U13.7@-416.83,2250 -311,2250 -224,2337 -94,2337 -79,2322 -79,2198 ; -79,2035.27 -79,2198
4V4: C17.1 C70.2 Q4.2 R49.1 U10.5 U10.10 U10.11 U11.1 U11.3 | length 1859
  Top Layer w8: U10.5@-1596.27,896.24 -1596.27,855.27 -1587,846 -1472,846 -1455.12,862.88 C70.2@-1455.12,943.05
  Top Layer w25: Q4.2@-1290.75,1002.5 -1275.5,1002.5 -1251,978 -1021,978 -852,1147 -852,1571 -877,1596 -877,1671 -1039,1833 -1039,1891 -1026,1904 -1026,1927 -1017.4,1935.6 U11.1@-1017.4,1972.51 ; U11.1@-1017.8,1972.51 -1014.68,1975.63 -1014.68,2006.59 -1002.67,2018.6 -958.13,2018.6 -946.12,2006.59 -946.12,1975.63 U11.3@-943,1972.51 ; U11.3@-942.6,1966.76 U11.3@-942.6,1972.51
5V: C20.2 C21.1 C94.2 IC1.8 L1.2 Q1.3 R19.2 R22.2 R39.1 U10.13 | length 2545.7
  Top Layer w8: R19.2@-1540.8,529 R19.2@-1540.01,529 -1508,529 -1495,542 v1(-1495,584)
  Top Layer w15: v1(-199,825) -111,825 -90,804 -90,743 IC1.8@-82,735
  Bottom Layer w8: v1(-1495,584) -1495,538.06 C21.1@-1482.4,525.46
  Bottom Layer w15: R22.2@-264,865 -264,823 Q1.3@-246,805 -226,825 v1(-199,825)
  Bottom Layer w19.68: -1643,768 -1641.65,769.35 -811.14,769.35 -755.48,825 -591,825 -538.16,877.84 -371.78,877.84 -371.59,877.65 ; -371.28,877.35 -346.72,877.35 ; -346.41,877.65 -314.65,877.65 -302,865 R22.2@-264,865
  Bottom Layer w39.37: L1.2@-1600,609 -1600,667 -1643,710 -1643,768 -1643,1024 -1607,1060 v3@-1555,1060
  Bottom Layer w78.74: L1.2@-1584.63,546.85 -1563.24,525.46 C21.1@-1482.4,525.46
  other v3: -1534,1050 -1554,1066 -1534,1070
*DIN1: P4.6 R2.2 R3.2 | length 137.2
  Bottom Layer w8: R3.2@-645,654 R2.2@-604.21,654 P4.6@-604.21,601.21 ; P4.6@-619,616 P4.6@-604.21,601.21 ; P4.6@-604,601 P4.6@-604.21,601.21 ; P4.6@-595.92,582.28 -604.21,590.57 P4.6@-604.21,601.21
*DIN2: P4.5 R5.2 | length 86.2
  Bottom Layer w8: R5.2@-730.21,653 -697,619.79 -697,589 P4.5@-703,583
*DOUT1: P4.3 U3.10 | length 69.9
  Top Layer w19.68: -871,584 U3.10@-871,628.28
  Bottom Layer w19.68: P4.3@-895.92,582.28 -872.72,582.28 P4.3@-871,584
  other v1: -852,555 -853,579
*DOUT2: P4.4 U3.11
  other v1: -818,554 -818,582
*RFID_CLK: R22.1 R23.2 U3.12 | length 1510.3
  Top Layer w8: U3.12@-771,628.28 -771,604 -724,557 -235,557 -225,547 -95.97,546.97 -73,524 30,524 58,552 v1(58,643)
  Bottom Layer w8: R23.2@-222,905 -79.91,905 79.81,745.28 79.81,664.81 v1(58,643)
  Bottom Layer w15: R22.1@-264,905 R23.2@-222,905
*RFID_DEMOD: IC1.1 R40.2 R41.1 U3.4 | length 642
  Top Layer w8: U3.4@-721,833 -721,795 -715.5,789.5 -651.5,789.5 -646,795 -646,866.31 -631.31,881 -557,881 v1@-522.5,846.5 ; R40.2@-389,732 R40.2@-386,735
  Top Layer w15: R40.2@-389,732 R41.1@-389,772.79 -389,807 v1(-388,808) ; R40.2@-386,735 IC1.1@-317,735
  Bottom Layer w8: v1(-524,845) -520.19,848.81 -420.14,848.81 -388,816.67 v1(-388,808)
*RFID_GND: U3.3 U4.3 | length 3136
  Top Layer w8: v1(-690,2335) -689,2336 -196,2336 -132,2272 -132,2188 -83,2139 -83,2089.25 -39,2045.25 -39,1912.08 24,1849.08 24,1106 -99.32,982.68 -271.68,982.68 -278,989 -454.58,989 -508.58,935 -667.63,935 -742.38,1009.75 -766.52,1009.75 -781,995.27 -781,949 -714,882 -685,882 -671,868 U3.3@-671,833
  Bottom Layer w8: U4.3@-785.99,2275.95 -785.99,2307.32 -793.81,2315.14 -793.81,2334.86 -779.73,2348.95 -703.95,2348.95 v1(-690,2335)
ACCEL_EN: Q6.1 U4.20 | length 310.5
  Top Layer w8: v1(-345,2071) -298.4,2117.6 Q6.1@-248.71,2117.6
  Bottom Layer w8: U4.20@-539.93,2069.26 v1@-345,2069.26
ACCEL_VCC: C5.2 C14.2 Q6.3 U5.3 U5.9 | length 595.8
  Top Layer w8: Q6.3@-337.29,2155 -286.81,2155 -275,2143.19 -221.47,2143.19 -199,2120.72 -199,2053 -183,2037 v1(-183,1959)
  Bottom Layer w8: C5.2@-395,1997 -394,1996 U5.3@-353.09,1996 -330,1996 -318.5,1984.5 ; -319,1984 -319,1965 -310,1956 -280,1956 -259.69,1976.32 U5.9@-238.91,1976.32 -207.32,1976.32 v1@-190,1959 ; v1(-183,1959) C14.2@-157,1959
ACCL_INT: U4.46 U5.5 | length 751
  Top Layer w8: v1@-839.67,2178 -807.67,2210 -766,2210 -750,2194 -750,2034 -730,2014 -632,2014 -579,2067 -445,2067 v1(-422,2044)
  Bottom Layer w8: U4.46@-894.26,2167.68 -849.32,2167.68 v1@-844,2173 ; v1@-414,2036 -353.72,2036 U5.5@-353.09,2035.37
  other v1: -842,2175
AMP1: C37.2 C38.2 D3.1 D6.2 IC1.5 R26.1 | length 718.9
  Top Layer w8: C37.2@-347,843 C37.2@-343.79,843 -325,843 v1(-320,838)
  Top Layer w15: v1(-200,770) -155,770 -140,755 -140,592 -133,585 -17,585 ; R26.1@-15,570.16 C38.2@-15,611.79
  Bottom Layer w8: D6.2@-341,767 v1@-203,767
  Bottom Layer w15: D3.1@-341,702.7 -341,767 -341,836 -339,838 v1(-320,838)
AMP2: C39.2 IC1.7 R36.1 | length 107.8
  Top Layer w15: IC1.7@-82,685 -52,685 -36,701 -15,701 -15,734.5 C39.2@-15.5,735
AUDIO: R93.1 U12.2 | length 2160.1
  Top Layer w8: v1(-450,1340) -444.81,1345.19 -422.14,1345.19 -362,1405.33 -362,1509 -383,1530 -383,1716.67 -316.9,1782.77 -202.48,1782.77 -158,1827.25 -158,2034.63 -183,2059.63 -183,2254 -209,2280 v1(-324,2280)
  Bottom Layer w8: U12.2@-895.3,1092.08 -895.3,1224.7 -792.23,1327.77 -568.23,1327.77 -532.19,1363.81 -477.81,1363.81 -455,1341 -455,1335 v1(-450,1340) ; R93.1@-505,2330 -356,2330 -324,2298 v1(-324,2280)
DIN1: U3.16 U4.39 | length 1845.1
  Top Layer w8: v1@-875.59,1849.41 -875.59,1829.84 -847.75,1802 -812.75,1802 -751,1740.25 -751,1438.49 -666,1353.49 -666,1161.18 -817,1010.18 -817,916 -798.16,897.16 -798.16,751.35 -758.81,712 -710,712 -688,690 -639,690 -628,679 -597,679 -571,653 U3.16@-571,628.28
  Bottom Layer w8: U4.39@-894.26,2029.89 -927.35,2029.89 -948.88,2008.36 -948.88,1972.68 -930.21,1954 -901,1954 -862,1915 -862,1877 -876,1863 v1@-876,1854
  other v1: -879,1848
DIN2: U3.15 U4.22 | length 2394.1
  Top Layer w8: v1@-741,1376 -743,1374 -743,1135.09 -853,1025.09 -853,893 -843.84,883.84 -843.84,771.58 -766.27,694 -719,694 -699,674 -652,674 -621,643 U3.15@-621,628.28 ; v1(-490,2025) -490,2023 -486.19,2019.19 -457.82,2019.19 -430.63,1992 -314,1992 -297,2009 -297,2060 -281,2076 -243,2076 -231,2064 -231,1983 -271.74,1942.26 -373.74,1942.26 -416,1900 -416,1517 -426,1507 v1@-426,1494
  Bottom Layer w8: v1@-741,1376 -738,1379 -677,1379 -591,1465 -455,1465 v1@-425.5,1494.5 ; U4.22@-518,2030 -495,2030 v1(-490,2025)
  other v1: -737,1375 -425,1494
FL_CS: U4.14 U13.1 | length 435.4
  Bottom Layer w8: U4.14@-539.93,2187.37 -512.61,2187.37 -475.16,2224.81 -306.82,2224.81 -265.63,2266 -235,2266 -201,2300 U13.1@-151.17,2300